# Altium PCB T1_MODIFYV2_0831.PCBDOC (part 1 of 3)
Units mm, origin at the board's own origin, x right, y up, seen from the top; angles counter-clockwise.
Board outline 155.78 x 129.36 mm, 2 copper layers (Top Layer, Bottom Layer); 121 components, 221 nets, 819 pads, 620 vias.
Unrouted connection lines stored in the file: 4.
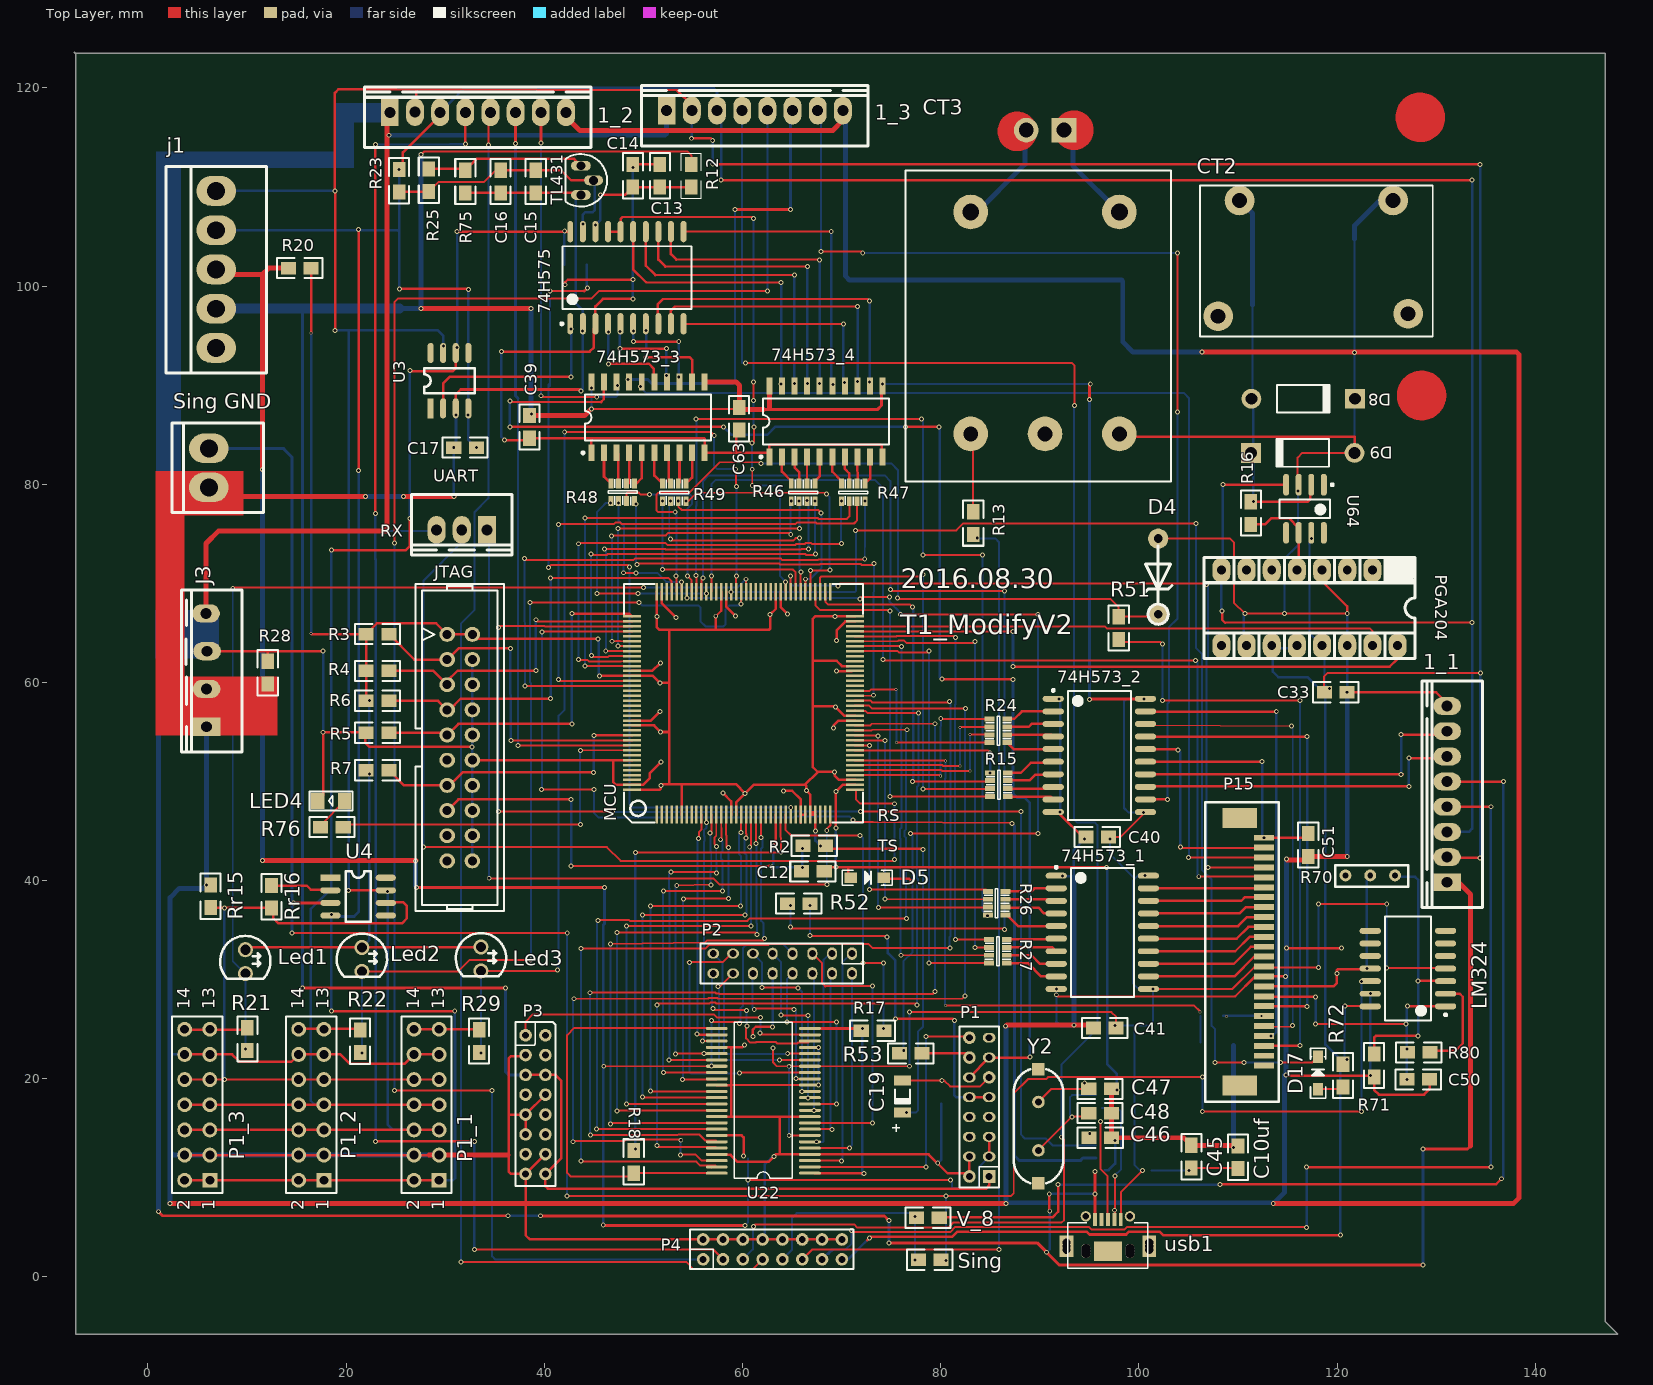
[diagram p0: Top Layer view]
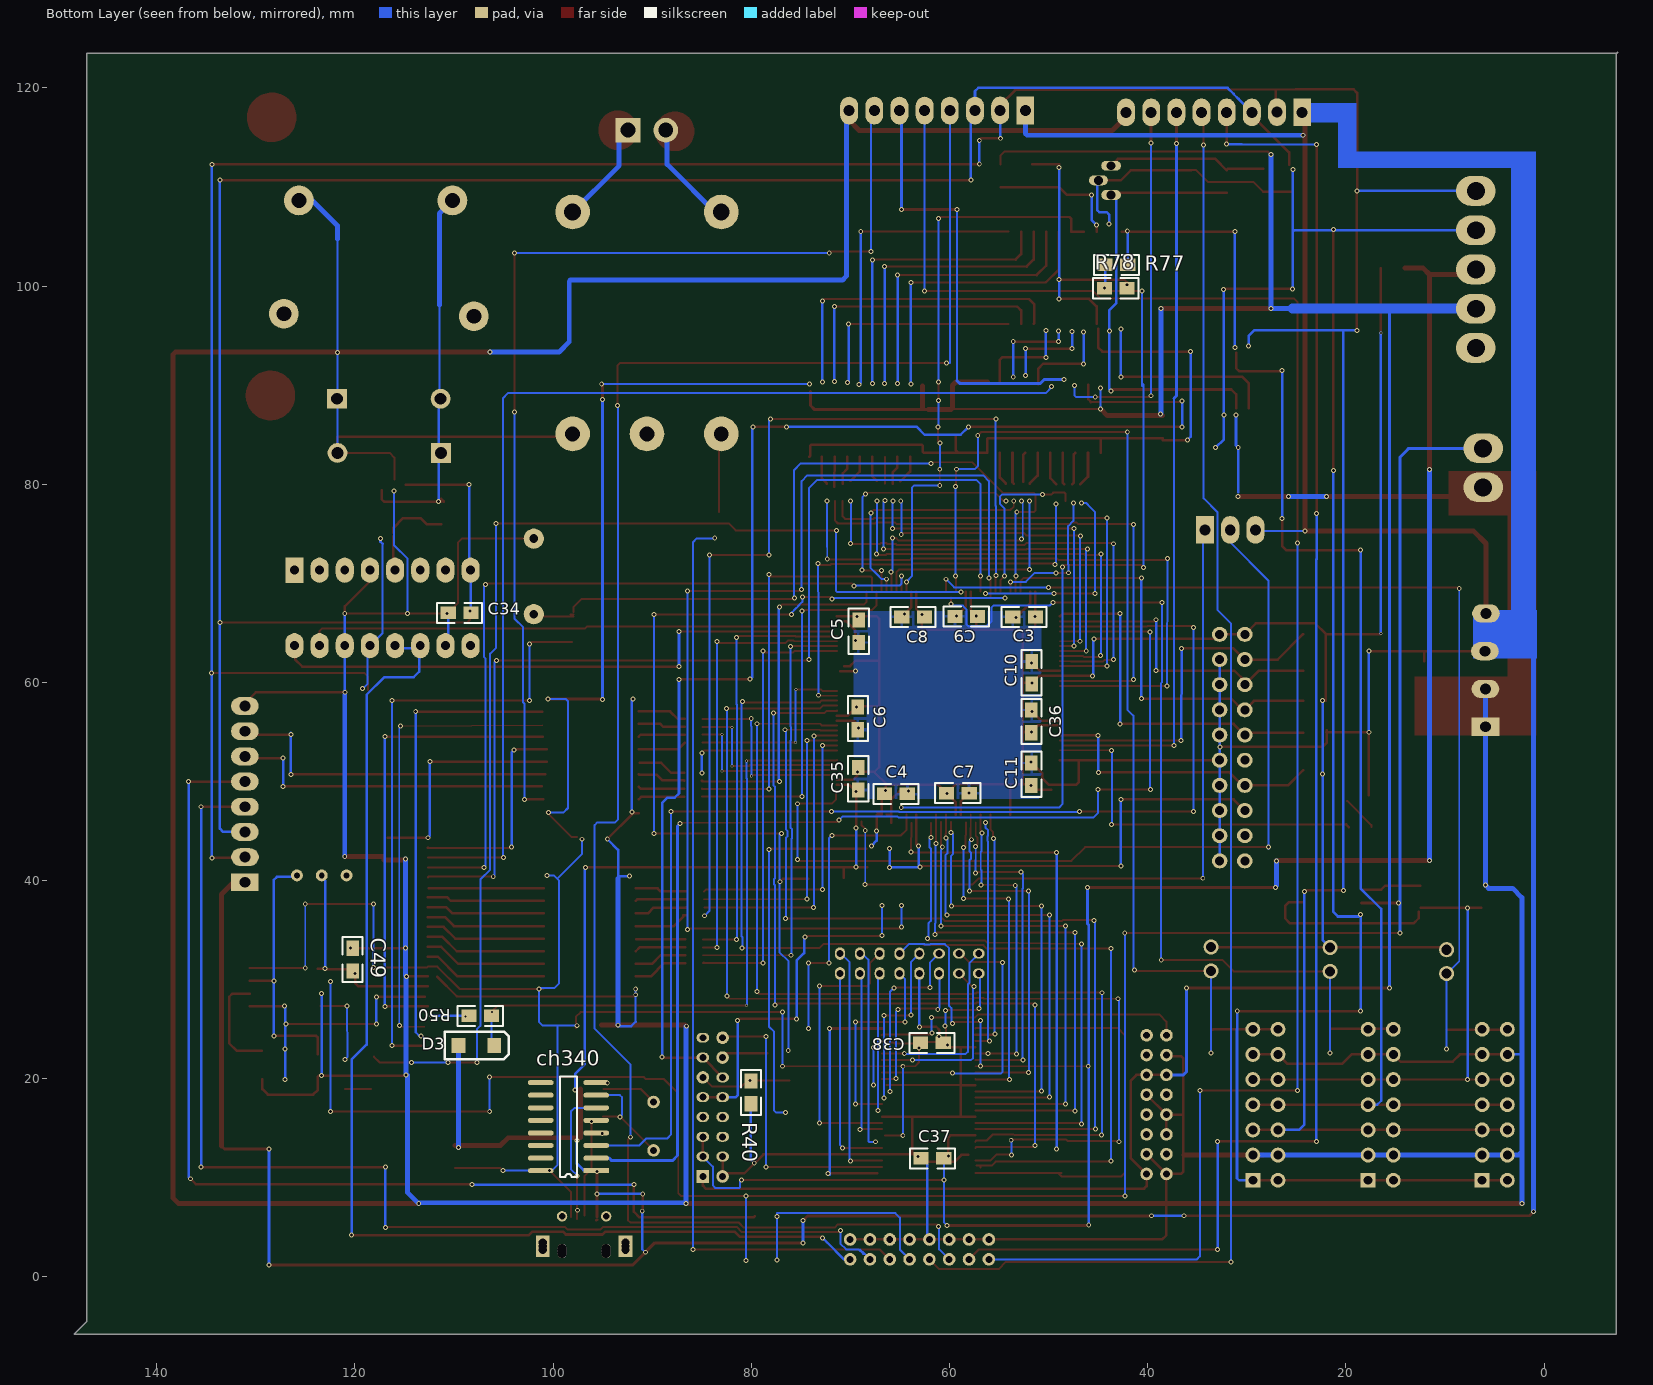
[diagram p1: Bottom Layer view, seen from below]

## Layer stack, top to bottom
Top Layer: signal copper 0.0356
Dielectric: dielectric 0.32, FR-4, Dk 4.8
Bottom Layer: signal copper 0.0356

## Board outline
-7.442,123.596 -7.341,123.495 147.066,123.495 147.066,-4.496 148.336,-5.766 -7.29,-5.766 -7.29,123.444 -7.442,123.596

## Design rules (kind name [scope] priority, off if disabled: settings)
Clearance [All] p1: gap=0.254
PolygonConnect [All] p1: connectstyle=Relief reliefconductorwidth=0.254 reliefentries=4 polygonreliefangle="90 Angle"
RoomDefinition T2 [InComponentClass('T2')] p1: confinementstyle=ConfineIn formatcopy=TRUE lockcomponents=FALSE outline -1143.406,-538.023 -1092.606,-538.023 -1092.606,-512.623 -1143.406,-512.623
RoutingVias [All] p1: holewidth=0.711 width=1.27 viastyle="Through Hole" minholewidth=0.711 minwidth=1.27 maxholewidth=0.711 maxwidth=1.27
SilkscreenOverComponentPads [All] p1: minsilkscreentomaskgap=0.254
SolderMaskExpansion [All] p1: expansion=0.102
TestPointUsage [All] p1: valid=0 allowmultiple=FALSE
Testpoint [All] p1: side=15 testpointundercomponent=TRUE minsize=1.016 maxsize=2.54 preferedsize=1.524 minholesize=0 maxholesize=1.016 preferedholesize=0.813 testpointgrid=0.025 style=1023 order=0-112345678
Width [All] p1: maxlimit=1 minlimit=0.1 preferedwidth=0.254 toplayer_prefwidth=0.2 bottomlayer_prefwidth=0.2 minimp=50.000000 maximp=50.000000 favimp=50.000000
23 further rules are at their usual default settings.

## Components (designator, comment, footprint, x,y, rotation, side; value= is the part's Value field where it differs from the comment)
1_1 "CON8" CON8 131.115,39.827 r90 top
1_2 "CON8" CON8 24.409,117.526 r0 top
1_3 "CON8" CON8 52.349,117.704 r0 top
74H573_1 "74HC573" SO20-7.5 96.317,34.773 r0 top
74H573_2 "74HC573" SO20-7.5 96.012,52.629 r0 top
74H573_3 "74HCT573" M20D 50.47,86.741 r0 top
74H573_4 "74HCT573" M20D 68.428,86.335 r0 top
74H575 "AD7545" SO20-7.5 48.336,100.838 r90 top
C3 "C" 0805 53.619,66.599 r180 bottom
C4 "C" 0805 64.262,48.743 r0 bottom
C5 "C" 0805 69.164,64.008 r90 bottom
C6 "C" 0805 69.24,55.22 r90 bottom
C7 "C" 0805 58.014,48.819 r0 bottom
C8 "C" 0805 64.821,66.599 r180 bottom
C9 "C" 0805 59.461,66.65 r180 bottom
C10 "C" 0805 51.714,62.103 r270 bottom
C10uf "10uf" 0805 110.007,10.922 r90 top
C11 "C" 0805 51.74,51.867 r270 bottom
C12 "C" 0805 68.25,40.919 r180 top
C13 "0.1" 0805 51.664,109.982 r90 top
C14 "10u" 0805 48.946,109.982 r90 top
C15 "0.1" 0805 39.141,111.684 r270 top
C16 "10u" 0805 35.585,111.684 r270 top
C17 "0.1" 0805 30.861,83.693 r0 top
C19 "22u/50V" c-1206 76.149,18.212 r90 top
C33 "1u" 0805 121.006,59.004 r180 top
C34 "1u" 0805 110.592,67.005 r180 bottom
C35 "C" 0805 69.215,49.124 r90 bottom
C36 "C" 0805 51.74,57.201 r270 bottom
C37 "0.1" 0805 60.579,11.963 r0 bottom
C38 "0.1" 0805 62.916,23.622 r180 bottom
C39 "0.1" 0805 38.506,84.633 r90 top
C40 "0.1u" 0805 94.666,44.399 r0 top
C41 "0.1u" 0805 95.428,25.121 r0 top
C45 "104" 0805 105.308,10.998 r90 top
C46 "104" 0805 94.971,14.046 r0 top
C47 "22p" 0805 97.231,18.974 r180 top
C48 "22p" 0805 97.231,16.535 r180 top
C49 "0.1" 0805 120.244,33.172 r270 bottom
C50 "0.1" 0805 129.337,19.939 r180 top
C51 "0.1uF" 0805 117.094,44.729 r270 top
C63 "0.1" 0805 59.665,85.471 r90 top
ch340 "CH340" SOP16 95.656,10.719 r0 bottom
CT2 "CT09" INDUCTER_1 134.925,104.318 r0 top
CT3 "CT09" TRA1 89.51,97.079 r180 top
D3 "3.3V" DO-36 109.55,23.368 r180 bottom
D4 "3.3V" ZD300 101.956,74.498 r270 top
D5 "3.3V" 1504D 72.593,40.284 r180 top
D8 "1N4148" DO-41 116.586,88.621 r0 top
D9 "1N4148" DO-41 116.535,83.16 r180 top
D17 "1N4148" 1504D 118.085,20.574 r270 top
j1 "CON5" CON5/0.4 6.883,93.751 r90 top
J3 "CON4" CON4 5.918,59.334 r90 top
JTAG "" JTAG_20 31.471,53.416 r270 top
Led1 "B_LED" LED 9.83,33.02 r270 top
Led2 "B_LED" LED 21.59,33.249 r270 top
Led3 "B_LED" LED 33.604,33.299 r270 top
LED4 "LED" LED_贴_1 19.66,48.057 r180 top
LM324 "LM324" SOP-14 127.152,31.115 r180 top
MCU "STM32F103ZET6" LQFP144 51.359,46.66 r90 top locked
P1 "Part-A" PARTA 84.896,10.138 r90 top
P1_1 "MHDR2X7" HDR2X7 29.388,9.754 r90 top
P1_2 "MHDR2X7" HDR2X7 17.755,9.754 r90 top
P1_3 "MHDR2X7" HDR2X7 6.248,9.754 r90 top
P2 "Part-B" PARTB 71.048,32.627 r180 top
P3 "Part-C" Part-C 38.109,24.388 r270 top
P4 "Part-D" Part-D 56.032,1.778 r0 top
P15 "SED1335" LCD_CM 113.589,47.65 r270 top
PGA204 "PGA204" DIP16 126.111,71.323 r180 top
R2 "R" 0805 66.091,43.51 r0 top
R3 "10K" 0805 22.022,64.872 r0 top
R4 "10K" 0805 22.022,61.163 r0 top
R5 "10K" 0805 22.022,54.915 r0 top
R6 "10K" 0805 22.022,58.141 r0 top
R7 "10K" 0805 22.022,51.13 r0 top
R12 "100" 0805 54.839,112.268 r270 top
R13 "0K" 0805 83.287,77.216 r270 top
R15 "470" 8P4R_0603 84.988,50.876 r0 top
R16 "1K" 0805 111.305,78.232 r270 top
R17 "470" 0805 71.984,24.841 r0 top
R18 "470" 0805 49.022,10.465 r90 top
R20 "0" 0805 16.459,101.803 r180 top
R21 "0" 0805 10.033,22.86 r90 top
R22 "0" 0805 21.412,22.631 r90 top
R23 "1k" 0805 25.349,111.76 r270 top
R24 "470" 8P4R_0603 84.938,56.312 r0 top
R25 "2k" 0805 28.346,109.525 r90 top
R26 "470" 8P4R_0603 84.76,38.913 r0 top
R27 "470" 8P4R_0603 84.887,34.061 r0 top
R28 "0" 0805 12.09,62.128 r270 top
R29 "0" 0805 33.426,22.657 r90 top
R40 "1K" 0805 80.035,17.475 r90 bottom
R46 "33" 8P4R_0603 64.922,78.283 r90 top
R47 "33" 8P4R_0603 69.977,78.283 r90 top
R48 "33" 8P4R_0603 46.711,78.308 r90 top
R49 "33" 8P4R_0603 51.918,78.283 r90 top
R50 "470" 0805 108.509,26.34 r180 bottom
R51 "470" 0805 97.968,64.338 r90 top
R52 "470" 0805 64.541,37.668 r0 top
R53 "470" 0805 75.844,22.555 r0 top
R70 "RESVR" RESVR 120.853,40.513 r0 top
R71 "47K" 0805 123.749,22.479 r270 top
R72 "47K" 0805 120.599,21.463 r270 top
R75 "3k" 0805 32.029,111.684 r270 top
R76 "47K" 0805 19.71,45.39 r180 top
R77 "3k" 0805 44.298,102.133 r180 bottom
R78 "3k" 0805 42.088,99.771 r0 bottom
R80 "15K" 0805 129.388,22.657 r180 top
Rr15 "0" 0805 6.325,37.262 r90 top
Rr16 "0" 0805 12.471,37.211 r90 top
Sing "470" 0805 80.035,1.727 r180 top
"Sing GND" "CON2" CON2/0.4 6.147,79.68 r90 top
TL431 "431" 29-04 43.688,110.668 r180 top
U3 "OP07" SO-8 28.524,87.655 r90 top
U4 "OP07" SO-8 18.415,40.284 r0 top
U22 "SN74ALVC164245" SSOP48 66.802,10.465 r180 top
U64 "OP07CP" SOP127P600X175-8N 116.764,77.521 r270 top
UART "CON3" CON3 34.214,75.387 r180 top
usb1 "CON5" USB-MICRO-AB 96.876,5.791 r90 top
V_8 "470" 0805 79.858,5.969 r180 top
Y2 "12M" XTAL_US 89.865,17.653 r270 top

## Footprints (in the part's own frame and the unit in brackets; to place one, negate y for a bottom-side part, rotate by r counter-clockwise, add the part's x,y. Pads: shape width x height; smd on the part's side, far side on the other; paste and mask are expansions set on the pad)
8P4R_0603 [mm]
  rect 1x0.5 smd: 1(0,0) 2(0,-0.8) 3(0,-1.6) 4(0,-2.4) 5(1.778,-2.4) 6(1.778,-1.6) 7(1.778,-0.8) 8(1.778,0)
  silkscreen extent -0.43,-2.67 2.18,0.25
29-04 [mm] "TO, Flat Index; 3 In-Line, Axial Leads; Body Dia. 4.8mm; Leads 0.48 x 0.51 mm (max)"
  oval 2x1 hole 0.9: 1(0,-1.47) 3(0,1.47)
  oval 1.9x1 hole 0.9: 2(-1.288,0)
  silkscreen extent -2.65,-2.65 1.55,2.65
0805 [mil]
  rect 60x50 smd: 1(0,0) 2(90,0)
  silkscreen extent -45,-40 135,40
1504D [mil]
  rect 50x40 smd: 1(65,0) 2(-65,0)
  silkscreen extent -99,-30 100,30
c-1206 [mm] "Chip Inductor, 2-Leads, Body 3.2x1.6mm, IPC Medium Density"
  rect 1x1.7 smd: 1(-1.6,0) 2(1.6,0)
  silkscreen extent -3.56,-0.75 0.7,1.02, body extent -1.6,-0.8 1.6,0.8, height 0.6
CON2/0.4 [mm]
  oval 3x4 hole 1.8: 1(0,0) 2(3.937,0)
  silkscreen extent -2.54,-5.51 6.5,3.71
CON3 [mil]
  rect 72x110 hole 43.31: 1(0,0)
  oval 72x110 hole 43.31: 2(100,0) 3(200,0)
  silkscreen extent -100,-140 300,100
CON4 [mil]
  rect 72x110 hole 43.31: 1(-150,0)
  oval 72x110 hole 43.31: 2(0,0) 3(150,-2) 4(300,2)
  silkscreen extent -250,-140 394,100
CON5/0.4 [mm]
  oval 3x4 hole 1.8: 1(0,0) 2(3.96,0) 3(7.92,0) 4(11.88,0) 5(15.84,0)
  silkscreen extent -2.54,-5.08 18.29,5.08
CON8 [mm]
  rect 1.8x2.8 hole 1.1: 1(0,0)
  oval 1.8x2.8 hole 1.1: 2(2.54,0.02) 3(5.08,0) 4(7.62,0) 5(10.16,0) 6(12.7,0) 7(15.24,0) 8(17.78,0)
  silkscreen extent -2.54,-3.56 20.32,2.54
DIP16 [mm]
  rect 1.829x2.54 hole 0.9: 1(0,0)
  oval 1.829x2.54 hole 0.9: 2(2.54,0) 3(5.08,0) 4(7.62,0) 5(10.16,0) 6(12.7,0) 7(15.24,0) 8(17.78,0) 9(17.78,7.62) 10(15.24,7.62) 11(12.7,7.62) 12(10.16,7.62) 13(7.62,7.62) 14(5.08,7.62) 15(2.54,7.62) 16(0,7.62)
  silkscreen extent -1.78,-1.27 19.56,8.89
DO-36 [mm]
  rect 1.4x1.5 smd: 1(0,0) 2(3.6,0)
  silkscreen extent -1.4,-1.4 5.08,1.4
DO-41 [mm] "Diode, Axial; Body 5.2 x 2.7 mm (LxDia. max), Lead Dia. 0.86 mm (max)"
  round 2 hole 1.2: 1(-5.23,0)
  rect 2x2 hole 1.2: 2(5.23,0)
  silkscreen extent -2.65,-1.41 2.74,1.4
HDR2X7 [mm] "Connector; Header; 7x2 Position"
  rect 1.5x1.5 hole 0.9: 1(0,0)
  round 1.5 hole 0.9: 2(0,2.54) 3(2.54,0) 4(2.54,2.54) 5(5.08,0) 6(5.08,2.54) 7(7.62,0) 8(7.62,2.54) 9(10.16,0) 10(10.16,2.54) 11(12.7,0) 12(12.7,2.54) 13(15.24,0) 14(15.24,2.54)
  silkscreen extent -1.27,-1.27 16.51,3.81
INDUCTER_1 [mm]
  round 3 hole 1.5: 0(-26.924,-7.366) 0(-24.765,4.318) 0(-9.271,4.318) 0(-7.747,-7.112)
  Top Layer circle w2.5: c-6.524,12.7 r1.25
  Top Layer circle w2.5: c-6.397,-15.367 r1.25
  silkscreen extent -28.76,-9.4 -5.26,5.82
JTAG_20 [mm]
  oval 1.5x1.575 hole 0.9: 1(-11.43,-1.27) 2(-11.43,1.27) 3(-8.89,-1.27) 4(-8.89,1.27) 5(-6.35,-1.27) 6(-6.35,1.27) 7(-3.81,-1.27) 8(-3.81,1.27) 9(-1.27,-1.27) 10(-1.27,1.27) 11(1.27,-1.27) 12(1.27,1.27) 13(3.81,-1.27) 14(3.81,1.27) 15(6.35,-1.27) 16(6.35,1.27) 17(8.89,-1.27) 18(8.89,1.27) 19(11.43,-1.27) 20(11.43,1.27)
  silkscreen extent -16.51,-4.45 16.51,4.45
LCD_CM [mm] "LCD_CM"
  rect 2x3.5 smd: 0(1.331,-3.41) 0(28.331,-3.41)
  rect 0.6x2 smd: 1(3.331,-0.957) 2(4.331,-0.957) 3(5.331,-0.957) 4(6.331,-0.957) 5(7.331,-0.957) 6(8.331,-0.957) 7(9.331,-0.957) 8(10.331,-0.957) 9(11.331,-0.957) 10(12.331,-0.957) 11(13.331,-0.957) 12(14.331,-0.957) 13(15.331,-0.957) 14(16.331,-0.957) 15(17.331,-0.957) 16(18.331,-0.957) 17(19.331,-0.957) 18(20.331,-0.957) 19(21.331,-0.957) 20(22.331,-0.957) 21(23.331,-0.957) 22(24.331,-0.957) 23(25.331,-0.957) 24(26.331,-0.957)
  silkscreen extent -0.25,-6.91 29.97,0.51
LED [mil]
  round 60 hole 40: 1(0,0) 2(95,0)
  silkscreen extent -55,-100 116,100
LED_贴_1 [mm]
  rect 1.4x1.6 smd: 1(-0.207,0.013) 2(2.562,0.013)
  silkscreen extent -1.02,-0.94 3.37,0.98
LQFP144 [mm]
  rect 1.8x0.254 smd: 1(-0.009,0.001) 2(-0.009,-0.499) 3(-0.009,-0.999) 4(-0.009,-1.499) 5(-0.009,-1.999) 6(-0.009,-2.499) 7(-0.009,-2.999) 8(-0.009,-3.499) 9(-0.009,-3.999) 10(-0.009,-4.499) 11(-0.009,-4.999) 12(-0.009,-5.499) 13(-0.009,-5.999) 14(-0.009,-6.499) 15(-0.009,-6.999) 16(-0.009,-7.499) 17(-0.009,-7.999) 18(-0.009,-8.499) 19(-0.009,-8.999) 20(-0.009,-9.499) 21(-0.009,-9.999) 22(-0.009,-10.499) 23(-0.009,-10.999) 24(-0.009,-11.499) 25(-0.009,-11.999) 26(-0.009,-12.499) 27(-0.009,-12.999) 28(-0.009,-13.499) 29(-0.009,-13.999) 30(-0.009,-14.499) 31(-0.009,-14.999) 32(-0.009,-15.499) 33(-0.009,-15.999) 34(-0.009,-16.499) 35(-0.009,-16.999) 36(-0.009,-17.499) 73(22.491,-17.499) 74(22.491,-16.999) 75(22.491,-16.499) 76(22.491,-15.999) 77(22.491,-15.499) 78(22.491,-14.999) 79(22.491,-14.499) 80(22.491,-13.999) 81(22.491,-13.499) 82(22.491,-12.999) 83(22.491,-12.499) 84(22.491,-11.999) 85(22.491,-11.499) 86(22.491,-10.999) 87(22.491,-10.499) 88(22.491,-9.999) 89(22.491,-9.499) 90(22.491,-8.999) 91(22.491,-8.499) 92(22.491,-7.999) 93(22.491,-7.499) 94(22.491,-6.999) 95(22.491,-6.499) 96(22.491,-5.999) 97(22.491,-5.499) 98(22.491,-4.999) 99(22.491,-4.499) 100(22.491,-3.999) 101(22.491,-3.499) 102_ADBURY(22.491,-2.999) 103(22.491,-2.499) 104(22.491,-1.999) 105(22.491,-1.499) 106(22.491,-0.999) 107(22.491,-0.499) 108(22.491,0.001)
  rect 0.254x1.8 smd: 37(2.491,-19.999) 38(2.991,-19.999) 39(3.491,-19.999) 40(3.991,-19.999) 41(4.491,-19.999) 42(4.991,-19.999) 43(5.491,-19.999) 44(5.991,-19.999) 45(6.491,-19.999) 46(6.991,-19.999) 47(7.491,-19.999) 48(7.991,-19.999) 49(8.491,-19.999) 50(8.991,-19.999) 51(9.491,-19.999) 52(9.991,-19.999) 53(10.491,-19.999) 54(10.991,-19.999) 55(11.491,-19.999) 56(11.991,-19.999) 57(12.491,-19.999) 58(12.991,-19.999) 59(13.491,-19.999) 60(13.991,-19.999) 61(14.491,-19.999) 62(14.991,-19.999) 63(15.491,-19.999) 64(15.991,-19.999) 65(16.491,-19.999) 66(16.991,-19.999) 67(17.491,-19.999) 68(17.991,-19.999) 69(18.491,-19.999) 70(18.991,-19.999) 71(19.491,-19.999) 72(19.991,-19.999) 109(19.991,2.501) 110(19.491,2.501) 111(18.991,2.501) 112(18.491,2.501) 113(17.991,2.501) 114(17.491,2.501) 115(16.991,2.501) 116(16.491,2.501) 117(15.991,2.501) 118(15.491,2.501) 119(14.991,2.501) 120(14.491,2.501) 121(13.991,2.501) 122(13.491,2.501) 123(12.991,2.501) 124(12.491,2.501) 125(11.991,2.501) 126(11.491,2.501) 127(10.991,2.501) 128(10.491,2.501) 129(9.991,2.501) 130(9.491,2.501) 131(8.991,2.501) 132(8.491,2.501) 133(7.991,2.501) 134(7.491,2.501) 135(6.991,2.501) 136(6.491,2.501) 137(5.991,2.501) 138(5.491,2.501) 139(4.991,2.501) 140(4.491,2.501) 141(3.991,2.501) 142(3.491,2.501) 143(2.991,2.501) 144(2.491,2.501)
  silkscreen extent -0.81,-20.8 23.29,3.3
M20D [mm] "Small Outline; 20 Leads; Body Width 5.3 mm; Pitch 1.27 mm"
  rect 0.6x1.7 smd: 1(-5.715,-3.575) 2(-4.445,-3.575) 3(-3.175,-3.575) 4(-1.905,-3.575) 5(-0.635,-3.575) 6(0.635,-3.575) 7(1.905,-3.575) 8(3.175,-3.575) 9(4.445,-3.575) 10(5.715,-3.575) 11(5.715,3.575) 12(4.445,3.575) 13(3.175,3.575) 14(1.905,3.575) 15(0.635,3.575) 16(-0.635,3.575) 17(-1.905,3.575) 18(-3.175,3.575) 19(-4.445,3.575) 20(-5.715,3.575)
  silkscreen extent -6.69,-3.7 6.35,2.33
Part-C [mm] "Part-C"
  round 1.27 hole 0.7: 33(0,0) 34(0,2) 35(2,0) 36(2,2) 37(4,0) 38(4,2) 39(6,0) 40(6,2) 41(8,0) 42(8,2) 43(10,0) 44(10,2) 45(12,0) 46(12,2) 47(14,0) 48(14,2)
  silkscreen extent -1.32,-1 15.19,3
Part-D [mm] "Part-D"
  round 1.27 hole 0.7: 49(0,0) 50(0,2) 51(2,0) 52(2,2) 53(4,0) 54(4,2) 55(6,0) 56(6,2) 57(8,0) 58(8,2) 59(10,0) 60(10,2) 61(12,0) 62(12,2) 63(14,0) 64(14,2)
  silkscreen extent -1.32,-1 15.19,3
PARTA [mm] "PARTA"
  rect 1.27x1.27 hole 0.7: 1(0,0)
  round 1.27 hole 0.7: 2(0,2) 11(10,0) 14(12,2) 16(14,2)
  oval 1x1.27 hole 0.7: 3(2,0) 4(2,2) 5(4,0) 6(4,2) 7(6,0) 8(6,2) 9(8,0) 10(8,2) 12(10,2) 13(12,0) 15(14,0)
  silkscreen extent -1.12,-1 15.14,3
PARTB [mm] "PARTB"
  oval 1x1.27 hole 0.7: 17(0,0) 18(0,2) 19(2,0) 20(2,2) 21(4,0) 22(4,2) 23(6,0) 24(6,2) 26(8,2) 28(10,2)
  oval 1x1.2 hole 0.7: 25(8,0)
  oval 1.2x1 hole 0.7: 27(10,0) 29(12,0) 30(12,2) 31(14,0) 32(14,2)
  silkscreen extent -1.12,-1 15.27,3
RESVR [mm]
  round 1.2 hole 0.6: 0(0,0) 1(2.5,0) 2(5,0)
  silkscreen extent -1.02,-1.14 6.35,1.02
SO20-7.5 [mm] "SOIC, 20-Leads, Body 13.0x7.4mm (max), Pitch 1.27mm, IPC Medium Density"
  oval 2.15x0.6 smd: 1(-4.65,5.715) 2(-4.65,4.445) 3(-4.65,3.175) 4(-4.65,1.905) 5(-4.65,0.635) 6(-4.65,-0.635) 7(-4.65,-1.905) 8(-4.65,-3.175) 9(-4.65,-4.445) 10(-4.65,-5.715) 11(4.65,-5.715) 12(4.65,-4.445) 13(4.65,-3.175) 14(4.65,-1.905) 15(4.65,-0.635) 16(4.65,0.635) 17(4.65,1.905) 18(4.65,3.175) 19(4.65,4.445) 20(4.65,5.715)
  silkscreen extent -4.77,-6.5 3.18,6.69, body extent -3.7,-6.5 3.7,6.5, height 2.65
SO-8 [mil]
  rect 80x24 smd: 1(0,0)
  oval 80x24 smd: 2(0,-50) 3(0,-100) 4(0,-150) 5(220,-150) 6(220,-100) 7(220,-50) 8(220,0)
  silkscreen extent 60,-175 160,25
SOP16 [mm]
  rect 2.6x0.5 smd: 1(0,0)
  oval 2.6x0.5 smd: 2(0,-1.27) 3(0,-2.54) 4(0,-3.81) 5(0,-5.08) 6(0,-6.35) 7(0,-7.62) 8(0,-8.89) 9(5.6,-8.89) 10(5.588,-7.62) 11(5.6,-6.35) 12(5.6,-5.08) 13(5.6,-3.81) 14(5.6,-2.54) 15(5.6,-1.27) 16(5.6,0)
  silkscreen extent 1.93,-9.53 3.66,0.64
SOP127P600X175-8N [mm] "SOP, 8-Leads, Body 5.1x4.0mm (max), Pitch 1.27mm, IPC Medium Density"
  oval 2.2x0.6 smd: 1(-2.425,1.905) 2(-2.425,0.635) 3(-2.425,-0.635) 4(-2.425,-1.905) 5(2.425,-1.905) 6(2.425,-0.635) 7(2.425,0.635) 8(2.425,1.905)
  silkscreen extent -2.55,-2.55 0.93,2.88, body extent -2,-2.55 2,2.55, height 1.75
SOP-14 [mm] "SOP, 14-Leads, Body 10.5x5.6mm (max), Pitch 1.27mm, IPC Medium Density"
  oval 2.15x0.6 smd: 1(-3.8,3.81) 2(-3.8,2.54) 3(-3.8,1.27) 4(-3.8,0) 5(-3.8,-1.27) 6(-3.8,-2.54) 7(-3.8,-3.81) 8(3.8,-3.81) 9(3.8,-2.54) 10(3.8,-1.27) 11(3.8,0) 12(3.8,1.27) 13(3.8,2.54) 14(3.8,3.81)
  silkscreen extent -3.93,-5.25 2.33,5.25, body extent -2.8,-5.25 2.8,5.25, height 2
SSOP48 [mil]
  oval 87x12 smd: 1(0,0) 2(0,-25) 3(0,-50) 4(0,-75) 5(0,-100) 6(0,-125) 7(0,-150) 8(0,-175) 9(0,-200) 10(0,-225) 11(0,-250) 12(0,-275) 13(0,-300) 14(0,-325) 15(0,-350) 16(0,-375) 17(0,-400) 18(0,-425) 19(0,-450) 20(0,-475) 21(0,-500) 22(0,-525) 23(0,-550) 24(0,-575) 25(370,-575) 26(370,-550) 27(370,-525) 28(370,-500) 29(370,-475) 30(370,-450) 31(370,-425) 32(370,-400) 33(370,-375) 34(370,-350) 35(370,-325) 36(370,-300) 37(370,-275) 38(370,-250) 39(370,-225) 40(370,-200) 41(370,-175) 42(370,-150) 43(370,-125) 44(370,-100) 45(370,-75) 46(370,-50) 47(370,-25) 48(370,0)
  silkscreen extent 70,-600 300,20
TRA1 [mm]
  round 3.5 hole 1.5: 1(-8.522,12.006) 2(6.478,12.006) 8(-1.022,12.006)
  round 3.5 hole 1.7: 3(-8.522,-10.394) 4(6.478,-10.394)
  rect 2.5x2.5 hole 1.5: 5(-2.934,-18.649)
  round 2.5 hole 1.5: 6(0.876,-18.649)
  Top Layer circle w2: c-3.934,-18.649 r1
  Top Layer circle w2: c1.781,-18.522 r1
  silkscreen extent -13.73,-14.59 13.04,16.78
USB-MICRO-AB [mm]
  rect 2x2.8 smd: 0(-3.2,0)
  round 1.4 hole 0.83: 0(-3.055,4.175) 0(-3.055,-4.175) 0(-2.7,4.175) 0(-2.7,-4.175) 0(-2.315,4.175) 0(-2.315,-4.175)
  rect 2.2x1.4 hole 0.83: 0(-2.7,4.175) 0(-2.7,-4.175)
  round 1.05 hole 0.65: 0(0.325,2.225) 0(0.325,-2.225)
  rect 1.35x0.4 smd: 1(0,-1.3) 2(0,-0.65) 3(0,0) 4(0,0.65) 5(0,1.3)
  round 0.9 hole 0.9 unplated: 6(-3.45,-2.225) 6(-3.45,2.225) 6(-3.175,-2.225) 6(-3.175,2.225) 6(-2.9,-2.225) 6(-2.9,2.225)
  silkscreen extent -4.9,-4.03 -0.3,4.03
XTAL_US [mil]
  round 50 hole 28: 1(0,0) 2(192.13,0)
  rect 50x50 smd: ""(-130.32,0) ""(322.44,0)
  silkscreen extent -131,-98 323,98
ZD300 [mil]
  round 80 hole 35.43: A(0,0) K(300,0)
  silkscreen extent 30,-51 340,55

## Part data
1_1 1_2 1_3 j1 J3 "Sing GND" usb1: "Connector"
74H573_3 74H573_4: library part 74HC573
C10uf C13 C14 C40 C41 C45 C46 C47 C48 C51: library part CAP, "Capacitor"
C15 C16 C17: library part Cap_5, "Capacitor"
C19: library part "Cap Pol1", "Polarized Capacitor (Radial)"
C33 C34 C37 C38 C39 C49 C50 C63: library part Cap, "Capacitor"
ch340: library part CH340G
D3 D4 D5: library part "DIODE SCHOTTKY", "Schottky Diode"
D8 D9 D17: library part "Diode 1N4007", "1 Amp General Purpose Rectifier"
JTAG: library part JTAG
P1 P2 P3 P4: library part "Header 16", "Header, 16-Pin"
P1_1 P1_2 P1_3: "Header, 7-Pin, Dual row"
P15: library part 26PIN
PGA204: library part PGA205
R3 R4 R5 R6 R7: library part R
R12 R23 R25 R75 R77 R78: library part RES
R13 R40 R50 R51 R52 R53 R71 R72 R76 R80 Sing V_8: library part Res2, "Resistor"
R15 R24 R26 R27 R46 R47 R48 R49: library part RP4R
R16: library part RES2
R17 R18 R20 R21 R22 R28 R29 Rr15 Rr16: library part Res
R70: "Potentiometer"
TL431: library part TL431ACLP, "Programmable Precision Reference"
U3 U4 U64: library part OP07CN, "Very Low Offset Single Bipolar Operational Amplifier"
U22: library part IC_SN74ALVC164245
Y2: library part CRYSTAL, "Crystal"

## Free pads (board coordinates)
  round 5 on Keep-Out: 2(3,3) 2(3,118) 2(137,3) 2(137,118)

## Via types
v1: diameter 0.5, hole 0.3, Top Layer to Bottom Layer, 606 vias
v2: diameter 0.3, hole 0.2, Top Layer to Bottom Layer, 14 vias

## Nets (pads, with @x,y where several pads share a name; then routed paths per layer and width w, separated by ;. In a path a pad name is that pad's centre, name@x,y a point inside that pad or via, vN(x,y) a via of type N, cw(c..) or ccw(c..) an arc to the next point about the centre after c; other vN are vias at no path point)
15J: P1.15
36J: P3.36
42J: P3.42
44J: P3.44
45J: P3.45 | length 0.2
  Top Layer w0.254: P3.45@38.11,12.388 P3.45@38.11,12.557
+15V: 1_1.2 1_2.2 1_3.2 C33.2 j1.5 P1_1.5 P1_1.6 P1_2.5 P1_2.6 P1_3.5 P1_3.6 PGA204.13 U3.7 U4.7 U64.7 | length 390.8
  Top Layer w0.2: C33.2@118.694,59.207 118.694,60.604 119.05,60.96 v1(134.493,60.96)
  Top Layer w0.254: P1_3.6@3.708,14.834 P1_1.5@29.388,14.834 ; v1(18.888,95.514) v1(18.888,109.591) 18.863,109.617 18.863,119.497 19.221,119.856 25.06,119.856 53.407,119.739 54.889,118.256 1_3.2@54.889,117.978 ; v1(20.244,39.014) U4.7@24.003,39.014 ; 1_2.2@27.076,117.774 27.076,119.812 ; v1(54.864,114.91) 56.794,114.91 v1(56.998,114.706) ; v1(56.998,112.293) 133.35,112.268 v1(134.442,112.268) ; 1_1.2@131.425,42.316 133.575,42.298 v1(134.442,42.291)
  Bottom Layer w0.2: 117.221,73.99 117.221,64.973 PGA204.13@118.491,63.703 ; PGA204.13@118.72,63.424 118.72,59.868 v1(119.228,59.36)
  Bottom Layer w0.254: j1.5@6.883,109.591 v1(18.888,109.591) ; v1(18.888,95.514) 29.251,95.514 29.82,94.945 v1(29.82,93.929) ; v1(20.244,39.014) 20.244,85.217 20.244,95.412 ; v1(24.181,38.913) 24.181,15.367 24.714,14.834 P1_1.6@26.848,14.834 ; v1(54.864,114.91) 54.889,114.935 1_3.2@54.889,117.978 ; v1(56.998,112.293) v1(56.998,114.706) ; 117.221,73.99 117.424,74.193 v1(117.424,74.524) ; v1(134.442,42.291) v1(134.442,112.268)
-5V: j1.1
-15V: 1_1.3 1_2.3 1_3.3 C17.2 C34.2 j1.4 P1_1.1 P1_1.2 P1_2.1 P1_2.2 P1_3.1 P1_3.2 PGA204.8 R23.1 U3.4 U4.4 U64.4 | length 424.2
  Top Layer w0.254: P1_3.2@3.708,9.754 P1_1.1@29.388,9.754 ; v1(18.517,26.822) v1(30.963,26.822) ; v1(21.26,81.382) v1(21.26,105.689) ; v1(25.375,99.72) v1@32.283,99.72 ; R23.1@25.73,112.217 25.73,113.487 1_2.3@29.515,117.272 ; v1(57.836,110.693) v1(133.624,110.693) ; v1(108.407,67.183) 108.407,66.319 108.712,66.015 v1(133.624,66.065) ; v1(108.47,79.946) U64.4@114.859,79.946
  Bottom Layer w0.254: j1.4@6.883,105.631 25.229,105.631 25.349,105.512 ; v1(18.517,26.822) v1@18.517,36.373 ; v1@18.542,36.601 18.771,36.373 20.803,36.373 21.26,36.83 v1(21.26,81.382) ; v1(25.349,111.76) 25.349,110.795 25.349,105.512 ; v1(25.375,99.72) 25.369,101.066 25.361,102.769 25.349,105.512 ; P1_1.1@29.388,9.754 30.785,9.754 30.988,9.957 30.988,24.993 30.963,25.018 v1(30.963,26.822) ; 1_2.3@29.489,117.526 30.836,118.872 31.316,119.352 31.316,119.378 31.928,119.99 57.099,119.99 57.429,119.659 1_3.3@57.429,118.466 ; v1(32.334,99.67) v1(32.309,86.995) 32.309,84.531 v1(33.147,83.693) ; v1(57.836,110.693) 1_3.3@57.836,116.628 ; C34.2@108.306,67.005 108.306,71.298 108.47,71.462 108.47,78.613 v1(108.47,79.946) ; 1_1.3@131.115,44.907 133.299,44.907 133.624,45.232 v1(133.624,110.693)
  other v1: 18.517,36.576
-23V: C49.2 LM324.11 P15.16 R70.1 | length 22
  Top Layer w0.254: P15.16@112.632,29.319 119.642,29.319 119.99,29.667 119.99,30.937 120.117,31.064 122.946,31.064 v1(123.022,31.14) ; LM324.11@123.022,31.115 LM324.11@123.774,31.115
  Bottom Layer w0.254: v1(123.022,31.14) 123.022,39.979 R70.1@123.404,40.361
  other v1: 119.99,30.607
A10: D5.2 R53.1 | length 80
  Top Layer w0.2: v1(71.857,68.428) 72.06,68.631 v1(74.854,68.631) ; v1(75.946,66.827) v1(89.84,66.827) ; v1(76.937,44.729) v1(89.84,44.729)
  Top Layer w0.254: D5.2@74.244,40.183 76.81,40.183 v1(77.114,39.878)
  Bottom Layer w0.2: v1(74.854,68.631) 74.854,68.123 75.311,67.666 ; 75.127,67.84 75.136,67.84 75.673,67.304 75.673,67.294 75.946,67.021 v1(75.946,66.827) ; v1(76.276,22.86) 76.231,22.905 76.231,31.841 77.165,32.776 77.165,44.729 v1(76.937,44.729) ; v1(89.84,44.729) v1(89.84,66.827)
AC6.3: P1_1.9 P1_1.10 P1_2.9 P1_2.10 P1_3.9 P1_3.10 Rr15.1 Rr16.1 U4.6 | length 66.9
  Top Layer w0.2: P1_3.10@3.708,19.914 P1_3.9@6.248,19.914 P1_2.10@15.215,19.914 P1_2.9@17.755,19.914 P1_1.10@26.848,19.914 27.965,19.914 P1_1.9@29.388,19.914
  Top Layer w0.254: Rr15.1@6.325,37.262 Rr16.1@12.421,37.262 ; Rr16.1@12.649,36.855 12.649,36.195 13.157,35.687 20.726,35.687 25.629,35.687 26.137,36.195 26.137,37.44 25.756,37.821 U4.6@24.308,37.821
  Bottom Layer w0.254: v1@7.696,19.914 v1(7.722,19.939) v1(7.722,37.211)
AD_BUZY: P1.14 R53.2 | length 4.7
  Top Layer w0.254: R53.2@78.384,22.555 82.479,22.555 P1.14@82.896,22.138
AD_CONV: MCU.99 R52.1 | length 112
  Top Layer w0.2: MCU.99@55.88,68.529 55.877,68.532 55.877,70.381 v1(56.032,70.536) ; v1(64.846,35.306) 64.999,35.154 86.411,35.154 v1@86.589,34.976 ; v1(74.93,69.393) 75.088,69.235 86.442,69.235 v1(86.462,69.215)
  Bottom Layer w0.2: v1(56.032,70.536) 56.032,80.315 ; 56.058,80.34 56.032,80.315 ; v1(64.846,35.306) 64.846,36.017 v1(64.846,37.465) ; v1(74.93,69.393) 74.93,80.315 74.355,80.89 61.323,80.89 61.312,80.879 60.811,80.879 60.8,80.89 56.608,80.89 56.032,80.315 ; v1(86.464,35.082) v1@86.464,69.215
AD_CONV1: P1.9 P1.10 R52.2 | length 36.7
  Top Layer w0.2: v1@66.777,34.417 74.473,34.417 v1(74.6,34.29)
  Top Layer w0.254: v1(75.438,26.035) 81.229,26.035 v1(81.382,25.883) ; P1.10@82.896,18.138 P1.9@84.896,18.138
  Bottom Layer w0.2: v1(66.802,34.468) v1(66.802,37.49)
  Bottom Layer w0.254: v1(74.6,34.29) 74.625,34.29 74.676,34.239 74.676,32.69 75.438,31.928 v1(75.438,26.035) ; v1(81.382,25.883) 81.382,18.313 81.557,18.138 P1.10@82.896,18.138
AD_D0: P1.16 U22.2 | length 29.3
  Top Layer w0.2: U22.2@66.802,11.1 66.822,11.08 76.937,11.08 v1(78.531,11.08) ; v1(78.531,24.251) 82.783,24.251 P1.16@82.896,24.138
  Bottom Layer w0.2: v1(78.531,11.08) 78.531,13.284 v1(78.531,24.251)
AD_D1: P2.17 U22.3 | length 24.6
  Top Layer w0.2: U22.3@66.802,11.735 69.926,11.735 v1(69.977,11.684)
  Bottom Layer w0.2: v1@70.002,11.709 70.114,11.821 70.114,31.785 70.956,32.627 P2.17@71.048,32.627
AD_D2: P2.18 U22.5 | length 21.7
  Top Layer w0.2: U22.5@66.802,13.005 70.764,13.005 v1(70.79,13.03)
  Bottom Layer w0.2: v1(70.79,13.03) 71.048,13.288 71.048,29.083 P2.18@71.048,30.627
AD_D3: P2.19 U22.6 | length 20.2
  Bottom Layer w0.2: v1(67.462,13.64) 68.123,13.64 68.194,13.711 68.194,31.801 68.194,32.024 68.797,32.627 P2.19@69.048,32.627
AD_D4: P2.20 U22.8 | length 18.5
  Top Layer w0.2: U22.8@66.802,14.91 v1@69.034,14.91
  Bottom Layer w0.2: v1@68.961,14.808 68.906,14.863 68.906,30.298 P2.20@69.418,30.81
  other v1: 69.048,14.895
AD_D5: P2.21 U22.9 | length 28.7
  Top Layer w0.2: U22.9@66.802,15.545 v1(73.101,15.545) ; P2.21@67.093,32.627 68.047,31.674 68.047,29.642 ; 68.351,29.337 v1(73.101,29.337)
  Top Layer w0.254: P2.21@67.048,32.627 P2.21@67.093,32.627 ; 68.047,29.642 68.351,29.337
  Bottom Layer w0.2: v1(73.101,15.545) 73.101,18.009 v1(73.101,29.337)
AD_D6: P2.22 U22.11 | length 13.9
  Bottom Layer w0.2: P2.22@67.048,30.627 67.225,30.45 67.225,29.159 v1(67.225,16.806)
AD_D7: P2.24 U22.12 | length 21.2
  Top Layer w0.2: v1(64.506,25.715) v1(69.51,25.715) ; U22.12@66.802,17.45 v1@69.494,17.45
  Bottom Layer w0.2: v1(64.506,25.715) 64.506,30.085 P2.24@65.048,30.627 ; v1(69.51,25.715) v1(69.51,17.434) v1@69.545,17.399
AD_D8: P2.25 U22.13 | length 17.6
  Top Layer w0.2: v1(63.902,26.441) 63.975,26.368 v1(66.621,26.368)
  Bottom Layer w0.2: P2.25@63.048,32.627 63.902,31.773 63.902,30.709 v1(63.902,26.441) ; v1(66.621,26.368) v1(66.621,18.063) v1@66.624,18.059
AD_D9: P2.27 U22.14 | length 18.1
  Top Layer w0.2: v1(61.976,29.185) v1@65.608,29.185
  Bottom Layer w0.2: P2.27@61.048,32.627 61.073,32.627 61.976,31.725 v1(61.976,29.185) ; v1(65.608,29.159) 66.015,28.753 v1(66.015,18.72)
AD_D10: P2.28 U22.16 | length 15.9
  Top Layer w0.2: v1@61.29,27.076 62.128,27.076 v1@65.1,27.076 ; v1@65.456,19.99 U22.16@66.802,19.99
  Bottom Layer w0.2: P2.28@61.011,30.59 61.011,27.153 61.163,27 v1(61.189,27) ; v1(65.176,27) 65.38,26.797 v1(65.38,20.015)
AD_D11: P2.29 U22.17 | length 28.2
  Top Layer w0.2: v1@54.458,31.773 58.011,31.773 58.865,32.627 P2.29@59.048,32.627 ; v1@59.715,20.625 U22.17@66.802,20.625
  Bottom Layer w0.2: v1(54.635,31.75) 54.635,20.701 54.813,20.523 59.614,20.523 v1(59.69,20.599)
AD_D12: P2.30 U22.19 | length 18.5
  Top Layer w0.2: v1(57.531,29.286) 57.707,29.286 P2.30@59.048,30.627 ; v1(63.729,21.895) U22.19@66.802,21.895
  Bottom Layer w0.2: v1@57.627,29.286 57.627,24.384 57.627,22.078 57.81,21.895 v1(63.729,21.895)
AD_D13: P2.31 U22.20 | length 19.1
  Top Layer w0.2: v1(64.567,22.53) U22.20@66.802,22.53
  Bottom Layer w0.2: P2.31@57.048,32.627 57.048,32.589 58.002,31.635 58.002,29.669 58.135,29.536 58.135,29.134 58.135,27.153 58.135,22.739 58.364,22.51 64.547,22.51 v1(64.567,22.53)
AD_D14: P2.32 U22.22 | length 16.8
  Top Layer w0.2: v1(57.023,27.076) 57.15,26.949 60.356,26.949 60.427,26.879 v1(60.427,26.873) ; v1(60.452,25.324) 60.372,25.244 60.372,24.074 60.793,23.653 61.312,23.653 61.377,23.718 63.344,23.718 63.485,23.577 65.545,23.577 65.64,23.671 66.673,23.671 U22.22@66.802,23.8
  Bottom Layer w0.2: v1(57.023,27.076) 57.006,27.076 56.927,27.156 56.927,30.506 P2.32@57.023,30.602 ; v1@60.401,25.273 60.402,25.325 v1(60.427,26.873)
AD_D15: P3.33 U22.23 | length 32.3
  Top Layer w0.2: P3.33@38.11,24.388 38.11,25.765 38.806,26.461 57.146,26.461 57.44,26.168 61.818,26.168 v1(61.824,26.162) ; v1(61.773,24.613) 61.773,24.486 61.807,24.451 66.785,24.451 U22.23@66.802,24.435 U22.23@66.878,24.435
  Bottom Layer w0.2: v1(61.773,24.613) 61.824,24.663 61.824,25.019 v1(61.824,26.162)
ADDR4_1: MCU.97 P15.5 | length 106.3
  Top Layer w0.2: MCU.97@56.858,69.151 v1@56.858,70.701 ; v1(74.193,62.306) 74.301,62.199 105.912,62.199 105.907,62.205 v1(105.74,62.205) ; v1(106.045,40.386) 106.07,40.411 112.54,40.411 P15.5@112.632,40.319
  Bottom Layer w0.2: v1(56.871,70.714) 56.871,80.01 57.297,80.436 60.612,80.436 60.623,80.425 61.5,80.425 61.511,80.436 73.361,80.436 74.193,79.604 v1(74.193,62.306) ; v1(105.74,62.205) 105.899,62.046 105.899,44.26 ; 105.899,44.233 105.899,40.532 v1@105.912,40.519
ADRST: C19.2 P1.11 R40.2 | length 9.4
  Top Layer w0.2: C19.2@76.149,19.812 80.366,19.812 80.95,19.228 83.986,19.228 P1.11@84.896,20.138
  other v1: 80.112,19.812
C1: P1_1.13 P1_1.14 R21.2
C2: P1_2.13 P1_2.14 R22.2 | length 6.6
  Top Layer w0.254: P1_2.14@15.215,24.613 15.646,25.044 R22.2@21.59,25.044
C3: P1_3.13 P1_3.14 R29.2 | length 12.7
  Top Layer w0.254: P1_3.14@3.708,24.943 6.248,24.943 9.83,24.943 ; 26.848,24.994 29.388,24.994 33.376,24.994 R29.2@33.426,24.943
CTR1_3: 1_2.6 MCU.135 | length 75.2
  Top Layer w0.2: v1(37.338,53.619) MCU.135@48.489,53.619
  Top Layer w0.3: v1(37.109,114.402) 1_2.6@37.109,117.526
  Bottom Layer w0.2: v1(37.338,53.619) 37.338,88.671
  Bottom Layer w0.3: v1(37.109,114.402) 37.109,88.9 37.338,88.671
CTR1_4: 1_2.7 74H573_3.18 | length 37.4
  Top Layer w0.2: v1(39.649,88.925) 39.771,88.804 v1(45.294,88.804)
  Top Layer w0.3: v1(39.649,114.452) 1_2.7@39.649,117.526
  Bottom Layer w0.2: v1(39.649,88.925) v1(39.649,114.452) ; v1(45.294,88.804) 47.238,88.804 47.396,88.962 v1(47.396,89.941)
CTR1_5: 1_3.6 74H573_3.17 | length 43.4
  Top Layer w0.3: v1(59.258,107.721) v1(64.846,107.721)
  Bottom Layer w0.2: 59.258,90.475 v1(59.258,107.721)
  Bottom Layer w0.3: v1(48.463,90.576) 50.444,90.576 50.876,90.145 58.928,90.145 59.258,90.475 ; v1(64.846,107.721) 1_3.6@64.846,117.196
CTR1_6: 1_3.7 74H573_2.12 | length 107.4
  Top Layer w0.2: v1(67.92,103.48) 72.009,103.48 v1(72.136,103.353) ; v1(103.886,103.353) 103.886,102.21 103.911,102.184 v1(103.911,87.3)
  Top Layer w0.254: 74H573_2.12@101.016,48.184 v1(102.895,48.184)
  Bottom Layer w0.2: v1(67.92,103.48) 1_3.7@67.92,117.399 ; v1(72.136,103.353) v1(103.886,103.353) ; v1(102.895,48.184) 102.895,57.865 103.022,57.992 103.022,65.557 103.911,66.446 v1(103.911,87.3)
CTR1_7: 1_1.6 74H573_2.13 | length 32.4
  Top Layer w0.254: 74H573_2.13@101.168,49.53 127.229,49.53 v1(127.254,49.505) ; v1@127.457,52.349 1_1.6@130.937,52.349
  Bottom Layer w0.254: v1(127.254,49.505) v1(127.254,52.349)
CTR1_8: 1_1.7 74H573_2.14 | length 34.3
  Top Layer w0.254: 74H573_2.14@100.787,50.724 v1@126.619,50.724 ; v1(126.467,54.737) 1_1.7@130.785,54.737
  Bottom Layer w0.254: v1(126.467,50.724) v1@126.467,54.915
CTR_4: MCU.101 R48.3 | length 17.5
  Top Layer w0.2: R48.3@48.311,78.308 48.311,79.045 48.428,79.162 49.507,79.162 49.701,78.969 v1(50.597,78.969) ; v1(54.458,70.714) 54.858,70.313 MCU.101@54.858,69.151
  Bottom Layer w0.2: v1(50.597,78.969) 54.686,78.969 54.922,78.733 54.922,78.033 54.458,77.569 v1(54.458,70.714)
CTR_5: MCU.103 R48.2 | length 14.4
  Top Layer w0.2: v1(48.012,71.064) 48.026,71.049 v1(49.276,71.049) ; MCU.103@53.858,69.151 v1(53.858,70.14)
  Bottom Layer w0.2: v1(47.498,78.08) 47.498,76.292 48.024,75.766 48.024,71.916 48.012,71.904 v1(48.012,71.064) ; v1(49.276,71.049) 51.388,71.049 52.302,70.135 v1@53.817,70.135
D0: MCU.114 R46.1 | length 34.4
  Top Layer w0.2: v1(46.787,74.778) 46.853,74.844 52.26,74.844 52.467,75.051 64.725,75.051 v1(64.872,74.905) ; v1(46.822,64.151) 47.207,64.151 47.211,64.155 47.629,64.155 47.633,64.151 MCU.114@48.858,64.151
  Bottom Layer w0.2: v1(46.787,74.778) 46.822,74.743 46.822,72.898 v1(46.822,64.151) ; v1@64.846,74.844 64.846,78.207 v1(64.922,78.283)
D1: MCU.115 R46.2 | length 34.4
  Top Layer w0.2: v1(47.42,63.651) MCU.115@48.858,63.651 ; v1(47.42,75.516) 48.463,75.516 48.666,75.516 61.773,75.516 63.779,75.516 63.983,75.516 v1(65.734,75.516)
  Bottom Layer w0.2: v1(47.42,63.651) 47.42,71.73 47.42,75.133 v1(47.42,75.516) ; v1(65.734,75.516) v1@65.734,78.283
  other v1: 65.722,78.283
D2: MCU.116 R46.3 | length 38.6
  Top Layer w0.2: v1(46.076,73.482) 52.187,73.482 52.279,73.389 53.156,73.389 53.159,73.393 65.888,73.393 65.978,73.482 v1(66.65,73.482) ; v1@46.229,63.147 47.629,63.147 47.633,63.151 MCU.116@48.858,63.151
  Bottom Layer w0.2: v1(46.076,73.482) 46.224,73.334 46.224,63.178 46.215,63.17 v1(46.203,63.17) ; v1(66.497,78.334) 66.65,78.181 v1(66.65,73.482)
D3: MCU.117 R46.4 | length 42.6
  Top Layer w0.2: v1(44.708,72.97) 44.8,72.878 46.326,72.878 46.388,72.94 52.087,72.94 52.091,72.935 53.344,72.935 53.347,72.939 66.076,72.939 66.078,72.94 66.338,72.94 66.399,72.878 67.294,72.878 v1(67.386,72.97) ; v1(44.78,62.713) 44.927,62.566 46.453,62.566 46.538,62.651 MCU.117@48.858,62.651
  Bottom Layer w0.2: v1(44.708,72.97) 44.708,62.734 44.729,62.713 v1(44.78,62.713) ; v1(67.322,78.283) 67.335,78.27 v1@67.335,72.97